# Altium PCB PCB1.PcbDoc
Units mil, origin at the board's own origin, x right, y up, seen from the top; angles counter-clockwise.
Board outline 4505.03 x 3000.03 mil, 4 copper layers (Top Layer, Internal Plane 1, Internal Plane 2, Bottom Layer), stack 25.634 mil thick; 48 components, 53 nets, 188 pads, 9 vias.
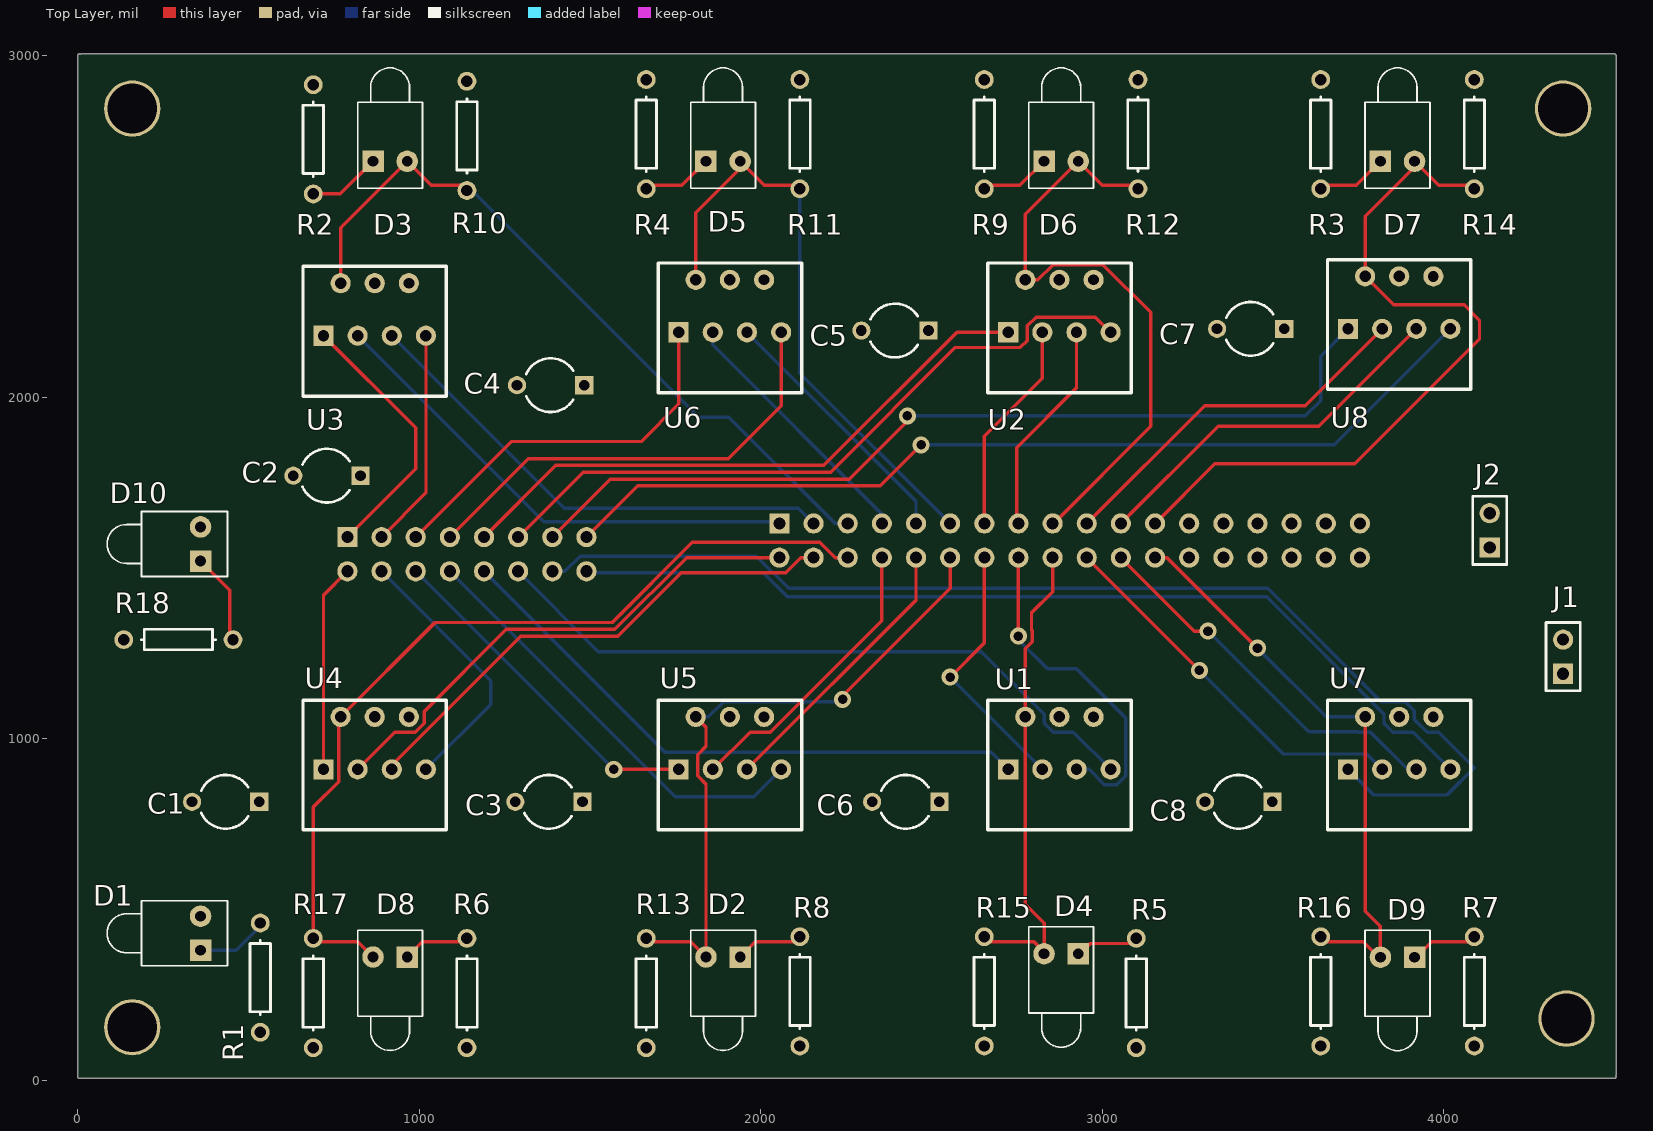
[diagram p0: Top Layer view]
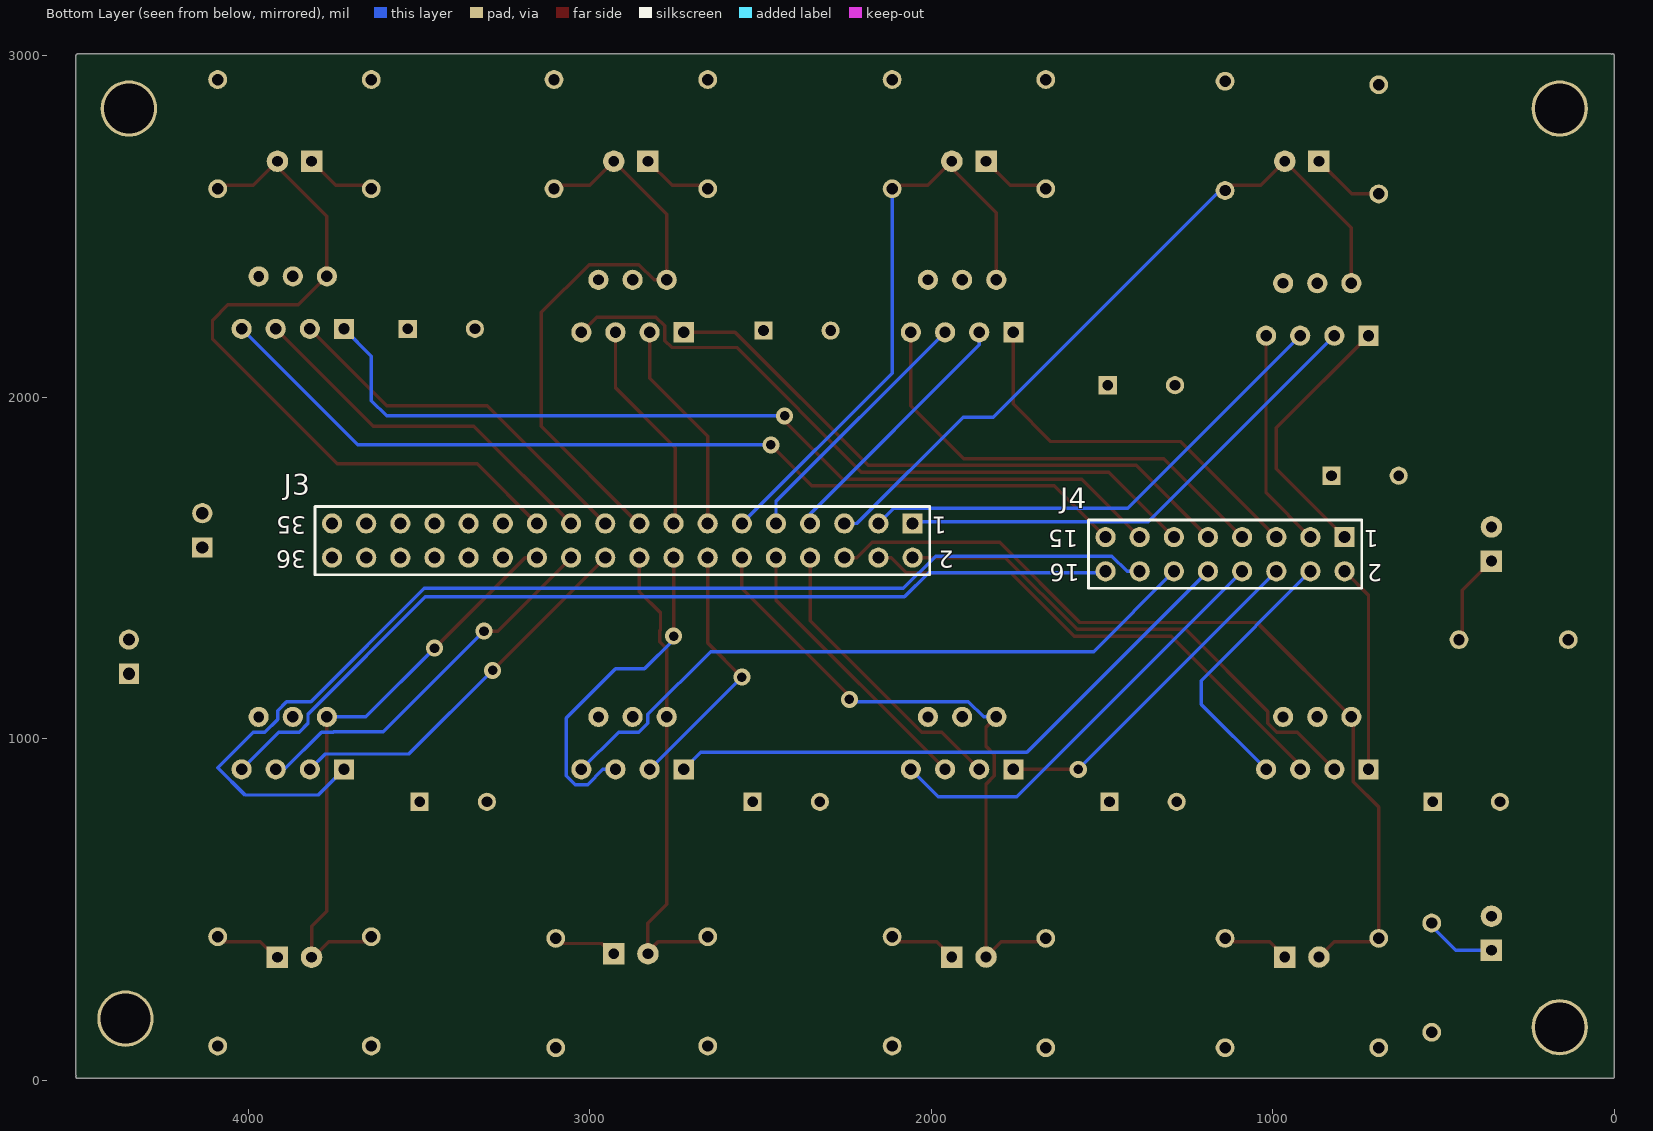
[diagram p1: Bottom Layer view, seen from below]
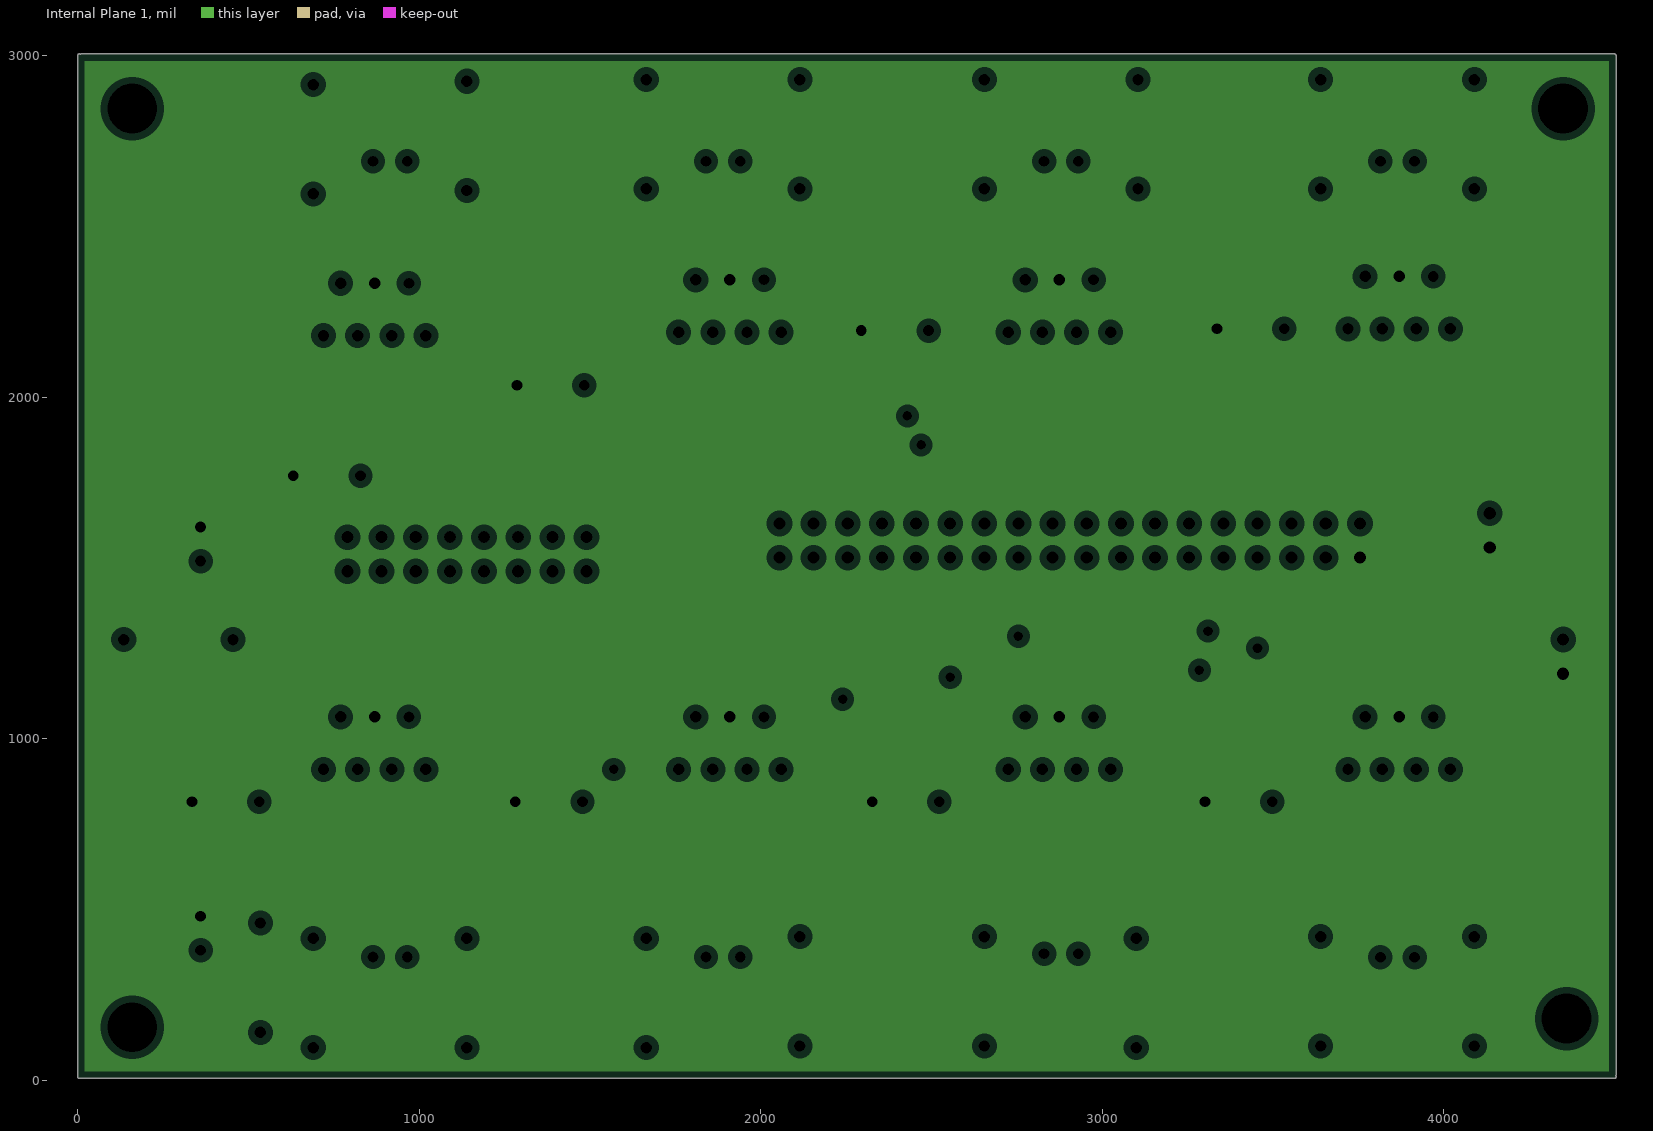
[diagram p2: Internal Plane 1, clearances drawn from the general rule]
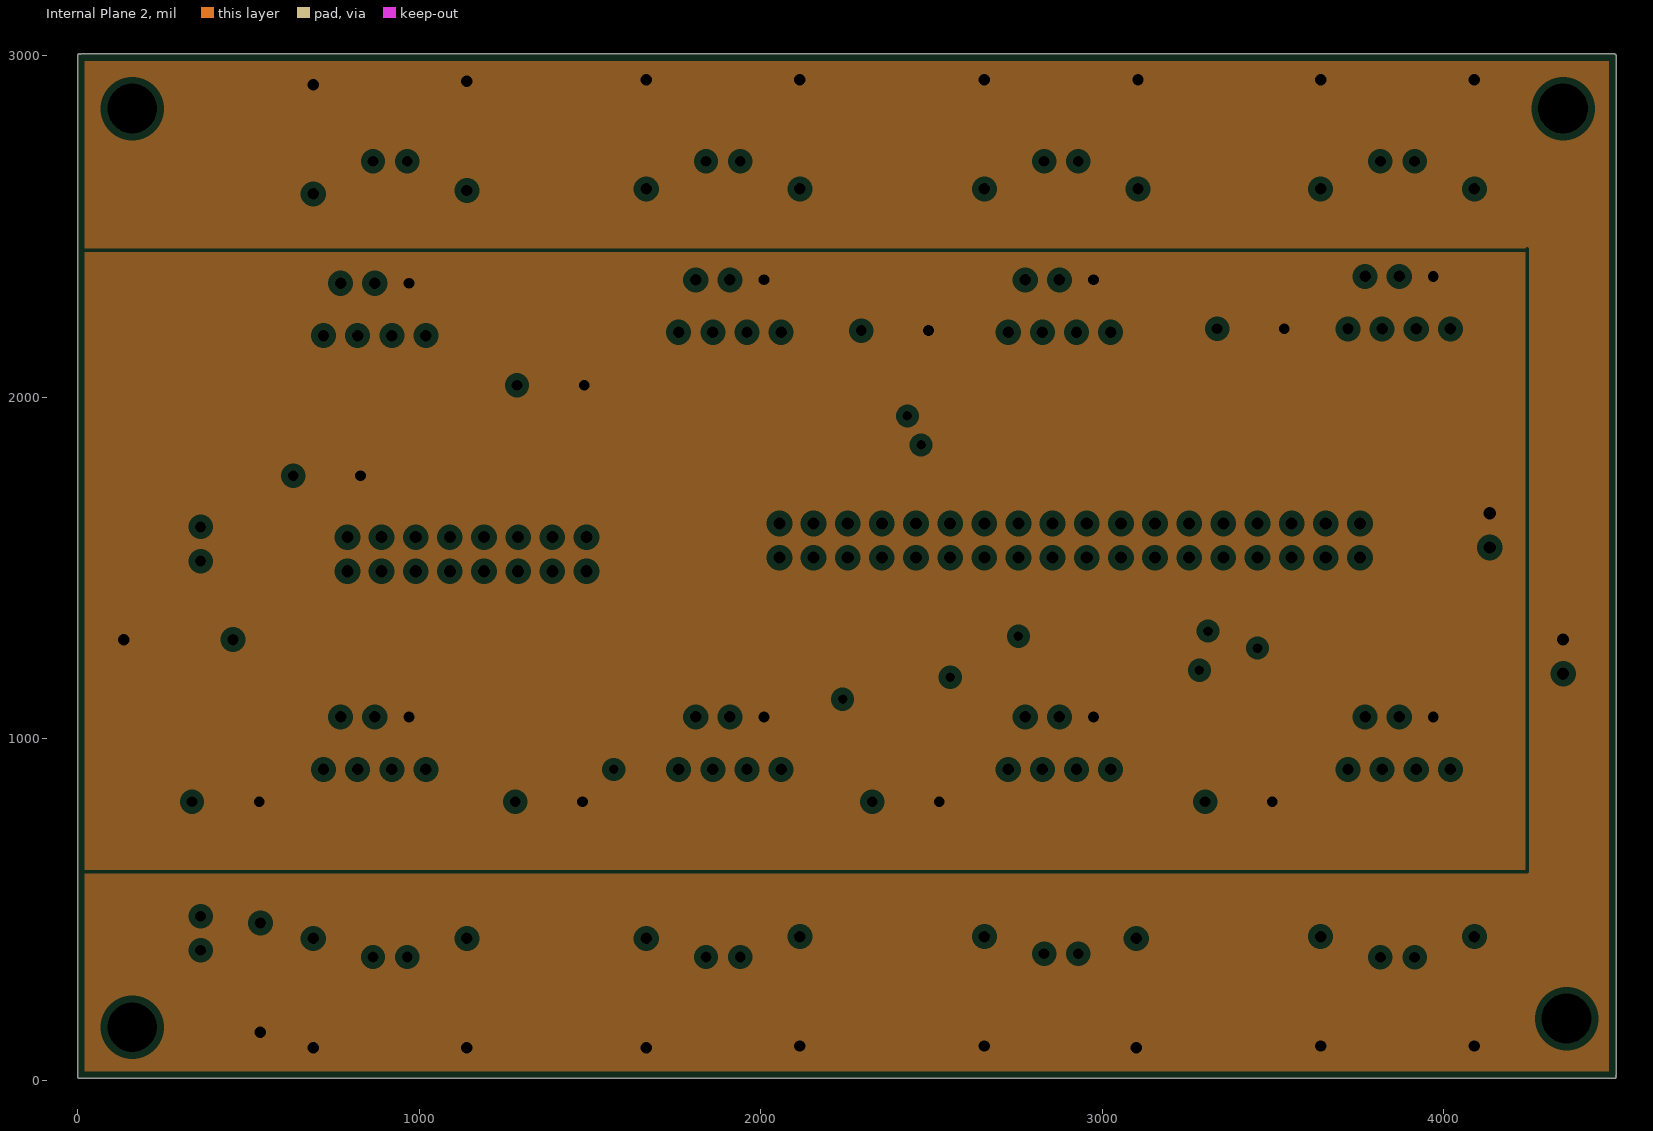
[diagram p3: Internal Plane 2, clearances drawn from the general rule]

## Layer stack, top to bottom
Top Solder: solder mask 0.4, Solder Resist, Dk 3.5
Top Layer: signal copper 1.4
Dielectric 1: prepreg 5, FR-4, Dk 4.2
Internal Plane 1: plane copper 1.417, net GND
Dielectric 3: core 10, Dk 4.2
Internal Plane 2: plane copper 1.417, net (Multiple Nets)
Dielectric 2: prepreg 5, Dk 4.2
Bottom Layer: signal copper 1.4
Bottom Solder: solder mask 0.4, Solder Resist, Dk 3.5

## Board outline
5,4.99 cw(c5,10) -0.01,10 -0.01,3000 cw(c5,3000) 7.5,3004.35 cw(c10,3000) 10,3005.01 4500,3005.01 cw(c4500,3000) 4505.02,3000 4505.02,15 cw(c4500,15) 4504.35,12.5 cw(c4500,10) 4505.02,10 cw(c4500,10) 4500,4.99

## Design rules (kind name [scope] priority, off if disabled: settings)
Clearance [All] p1: gap=10
HoleSize [All] p1: absolutevalues=TRUE maxlimit=200 minlimit=1 maxpercent=80.000 minpercent=20.000
PlaneClearance [All] p1: clearance=20
PlaneConnect [All] p1: planeconnectstyle=Relief reliefexpansion=20 reliefentries=4 reliefconductorwidth=10 reliefairgap=10
PolygonConnect [All] p1: connectstyle=Relief reliefconductorwidth=10 reliefentries=4 polygonreliefangle="90 Angle" airgapwidth=10
RoutingVias [All] p1: holewidth=28 width=50 viastyle="Through Hole" minholewidth=28 minwidth=50 maxholewidth=28 maxwidth=50
SolderMaskExpansion [All] p1: expansion=4
Width [All] p1: maxlimit=10 minlimit=10 preferedwidth=10
27 further rules are at their usual default settings.

## Components (designator, comment, footprint, x,y, rotation, side; value= is the part's Value field where it differs from the comment)
C1 "Cap1" CAPR5-4X5 433.43,815 r180 top
C2 "Cap1" CAPR5-4X5 730,1770 r180 top
C3 "Cap2" CAPR5-4X5 1380,815 r180 top
C4 "Cap2" CAPR5-4X5 1385,2035 r180 top
C5 "Cap2" CAPR5-4X5 2393.43,2195 r180 top
C6 "Cap2" CAPR5-4X5 2425,815 r180 top
C7 "Cap1" CAPR5-4X5 3435,2200 r180 top
C8 "Cap1" CAPR5-4X5 3400,815 r180 top
D1 "GREEN LED" LED-1 360,430 r180 top
D2 "RED LED" LED-1 1890,360.49 r270 top
D3 "RED LED" LED-1 915,2690.61 r90 top
D4 "RED LED" LED-1 2880,370 r270 top
D5 "RED LED" LED-1 1890,2690.61 r90 top
D6 "RED LED" LED-1 2880,2690.61 r90 top
D7 "RED LED" LED-1 3865,2690.61 r90 top
D8 "RED LED" LED-1 915,360.49 r270 top
D9 "RED LED" LED-1 3865,360 r270 top
D10 "GREEN LED" LED-1 360,1570 r180 top
J1 "3.3V PS" HDR1X2 4350,1190 r90 top
J2 "12V PS" HDR1X2 4135,1560 r90 top
J3 "Header 18X2" HDR2X18 2055,1630 r0 bottom
J4 "Header 8X2" HDR2X8 790,1590 r0 bottom
R1 "Res2" AXIAL-0.3 535,300 r270 top
R2 "Res2" AXIAL-0.3 690,2755 r90 top
R3 "Res2" AXIAL-0.3 3640,2770 r90 top
R4 "Res2" AXIAL-0.3 1665,2770 r90 top
R5 "Res2" AXIAL-0.3 3100,255 r270 top
R6 "Res2" AXIAL-0.3 1140,255 r270 top
R7 "Res2" AXIAL-0.3 4090,260 r270 top
R8 "Res2" AXIAL-0.3 2115,260 r270 top
R9 "Res2" AXIAL-0.3 2655,2770 r90 top
R10 "Res1" AXIAL-0.3 1140,2765 r90 top
R11 "Res1" AXIAL-0.3 2115,2770 r90 top
R12 "Res1" AXIAL-0.3 3105,2770 r90 top
R13 "Res1" AXIAL-0.3 1665,255 r270 top
R14 "Res1" AXIAL-0.3 4090,2770 r90 top
R15 "Res1" AXIAL-0.3 2655,260 r270 top
R16 "Res1" AXIAL-0.3 3640,260 r270 top
R17 "Res1" AXIAL-0.3 690,255 r270 top
R18 "Res3" AXIAL-0.3 295,1290 r180 top
U1 "TLE 5206-2S" "TLE 5206-2" 2665,732.83 r0 top
U2 "TLE 5206-2S" "TLE 5206-2" 2665,2012.83 r0 top
U3 "TLE 5206-2S" "TLE 5206-2" 660,2002.83 r0 top
U4 "TLE 5206-2S" "TLE 5206-2" 660,732.83 r0 top
U5 "TLE 5206-2S" "TLE 5206-2" 1700,732.83 r0 top
U6 "TLE 5206-2S" "TLE 5206-2" 1700,2012.83 r0 top
U7 "TLE 5206-2S" "TLE 5206-2" 3660,732.83 r0 top
U8 "TLE 5206-2S" "TLE 5206-2" 3660,2022.83 r0 top

## Footprints (in the part's own frame and the unit in brackets; to place one, negate y for a bottom-side part, rotate by r counter-clockwise, add the part's x,y. Pads: shape width x height; smd on the part's side, far side on the other; paste and mask are expansions set on the pad)
AXIAL-0.3 [mm] "Axial Device, Thru-Hole; 2 Leads; 0.3 in Pin Spacing"
  round 1.4 hole 0.85: 1(-4.064,0) 2(4.064,0)
  silkscreen extent -2.77,-0.76 2.77,0.76
CAPR5-4X5 [mm] "Capacitor; 2 Leads"
  rect 1.35x1.35 hole 0.8: 1(-2.5,0)
  round 1.35 hole 0.8: 2(2.5,0)
  silkscreen extent -1.69,-2 1.82,2
HDR1X2 [mm] "Connector; Header; 2 Position"
  rect 1.5x1.5 hole 0.9: 1(0,0)
  round 1.5 hole 0.9: 2(2.54,0)
  silkscreen extent -1.27,-1.27 3.81,1.27
HDR2X8 [mm] "Connector; Header; 8x2 Position"
  rect 1.5x1.5 hole 0.9: 1(0,0)
  round 1.5 hole 0.9: 2(0,2.54) 3(2.54,0) 4(2.54,2.54) 5(5.08,0) 6(5.08,2.54) 7(7.62,0) 8(7.62,2.54) 9(10.16,0) 10(10.16,2.54) 11(12.7,0) 12(12.7,2.54) 13(15.24,0) 14(15.24,2.54) 15(17.78,0) 16(17.78,2.54)
  silkscreen extent -1.27,-1.27 19.05,3.81
HDR2X18 [mm] "Connector; Header; 18x2 Position"
  rect 1.5x1.5 hole 0.9: 1(0,0)
  round 1.5 hole 0.9: 2(0,2.54) 3(2.54,0) 4(2.54,2.54) 5(5.08,0) 6(5.08,2.54) 7(7.62,0) 8(7.62,2.54) 9(10.16,0) 10(10.16,2.54) 11(12.7,0) 12(12.7,2.54) 13(15.24,0) 14(15.24,2.54) 15(17.78,0) 16(17.78,2.54) 17(20.32,0) 18(20.32,2.54) 19(22.86,0) 20(22.86,2.54) 21(25.4,0) 22(25.4,2.54) 23(27.94,0) 24(27.94,2.54) 25(30.48,0) 26(30.48,2.54) 27(33.02,0) 28(33.02,2.54) 29(35.56,0) 30(35.56,2.54) 31(38.1,0) 32(38.1,2.54) 33(40.64,0) 34(40.64,2.54) 35(43.18,0) 36(43.18,2.54)
  silkscreen extent -1.27,-1.27 44.45,3.81
LED-1 [mm] "LED; 2 Leads"
  rect 1.6x1.6 hole 0.8: 1(0,1.27)
  round 1.6 hole 0.8: 2(0,-1.27)
  silkscreen extent -2,-2.41 6.95,2.41
"TLE 5206-2" [mm] "H-bridge bent legs"
  rect 1.5x1.5 hole 0.85: 1(1.524,4.5)
  round 1.5 hole 0.85: 2(2.794,8.4) 3(4.064,4.5) 4(5.334,8.4) 5(6.604,4.5) 7(9.144,4.5)
  round 1.5 hole 0.8: 6(7.874,8.4)
  silkscreen extent 0,0 10.67,9.65

## Part data
C1 C2 C7 C8: library part Cap2, "Capacitor"
C3 C4 C5 C6: "Capacitor"
D1 D2 D3 D4 D5 D6 D7 D8 D9 D10: library part LED1, "Typical RED GaAs LED"
J1 J2: library part "Header 2", "Header, 2-Pin"
J3: "Header, 18-Pin, Dual row"
J4: "Header, 8-Pin, Dual row"
R1 R2 R3 R4 R5 R6 R7 R8 R9 R18: library part Res1, "Resistor"
R10 R11 R12 R13 R14 R15 R16 R17: "Resistor"
U1 U2 U3 U4 U5 U6 U7 U8: "Infineon TLE 5206-2S Hbridge"

## Free pads (board coordinates)
  round 165 hole 146: 2(160,2845) 5(160,155) 5(4350,2845) 5(4360,180)

## Via types
v1: diameter 50, hole 28, Top Layer to Bottom Layer, 9 vias

## Nets (pads, with @x,y where several pads share a name; then routed paths per layer and width w, separated by ;. In a path a pad name is that pad's centre, name@x,y a point inside that pad or via, vN(x,y) a via of type N, cw(c..) or ccw(c..) an arc to the next point about the centre after c; other vN are vias at no path point)
GND: C1.2 C2.2 C3.2 C4.2 C5.2 C6.2 C7.2 C8.2 D1.2 D10.2 J1.1 J2.1 J3.36 U1.4 U2.4 U3.4 U4.4 U5.4 U6.4 U7.4 U8.4
H1_EF: D3.2 J3.5 R10.1 U3.2 | length 2167.2
  Top Layer w10: U3.2 770,2495.61 D3.2 1035.61,2620 R10.1@1140,2620
  Bottom Layer w10: R10.1@1140,2620 1818.43,1941.57 1906.4,1941.57 2217.97,1630 J3.5
H1_IN1: J3.1 U3.3 | length 1465.5
  Bottom Layer w10: U3.3 1365.47,1634.53 2055,1634.53 J3.1
H1_IN2: J3.3 U3.5 | length 1462.8
  Bottom Layer w10: U3.5 1425.47,1674.53 2110.47,1674.53 J3.3
H1_OUT1: J4.1 U3.1 | length 784.7
  Top Layer w10: U3.1 990,1910 990,1790 J4.1
H1_OUT2: J4.3 U3.7 | length 643.8
  Top Layer w10: J4.3 1020,1720 U3.7
H2_EF: D5.2 J3.11 R11.1 U6.2 | length 1777.4
  Top Layer w10: U6.2 1810,2540 1940,2670 D5.2 2010.61,2620 R11.1@2115,2620
  Bottom Layer w10: R11.1@2115,2620 R11.1 2115,2070 J3.11
H2_IN1: J3.7 U6.3 | length 765
  Bottom Layer w10: U6.3 1860,2152.79 2355,1657.79 J3.7
H2_IN2: J3.9 U6.5 | length 765
  Bottom Layer w10: U6.5 2455,1695 J3.9
H2_OUT1: J4.5 U6.1 | length 1141.5
  Top Layer w10: J4.5 1270,1870 1650,1870 1760,1980 U6.1
H2_OUT2: J4.7 U6.7 | length 1344.5
  Top Layer w10: J4.7 1320,1820 1905,1820 2060,1975 U6.7
H3_EF: D6.2 J3.17 R12.1 U2.2 | length 1797.4
  Top Layer w10: J3.17 2857.79,1630 3141.93,1914.14 3141.93,2248.07 3001.93,2388.07 2856.56,2388.07 2812.03,2343.54 U2.2 2775,2535.61 D6.2 3000.61,2620 R12.1@3105,2620
H3_IN1: J3.13 U2.3 | length 630.4
  Top Layer w10: J3.13 2655,1885 2825,2055 U2.3
H3_IN2: J3.15 U2.5 | length 637.5
  Top Layer w10: J3.15 2750,1630 2750,1852.22 2925,2027.22 U2.5
H3_OUT1: J4.9 U2.1 | length 1783.5
  Top Layer w10: J4.9 1400,1800 2185,1800 2575,2190 U2.1
H3_OUT2: J4.11 U2.7 | length 2045.7
  Top Layer w10: J4.11 1480,1780 2205,1780 2570.47,2145.47 2760.74,2145.47 2780.47,2165.2 2780.47,2208.44 2806.56,2234.53 2980.47,2234.53 U2.7
H4_EF: D7.2 J3.23 R14.1 U8.2 | length 2226
  Top Layer w10: J3.23 3330,1805 3740,1805 4105,2170 4105,2225 4060,2270 3853.54,2270 U8.2 3770,2530 3915,2675 D7.2 3985.61,2620 R14.1@4090,2620
  Bottom Layer w10: U8.2@3764.53,2348.07 U8.2
H4_IN1: J3.19 U8.3 | length 1101.1
  Top Layer w10: J3.19 3300,1975 3595,1975 U8.3
H4_IN2: J3.21 U8.5 | length 1101.1
  Top Layer w10: J3.21 3340,1915 3635,1915 U8.5
H4_OUT1: J4.13 U8.1 | length 2667.6
  Top Layer w10: J4.13 1560,1760 2260,1760 2430,1930 v1(2430,1945)
  Bottom Layer w10: v1(2430,1945) 3595,1945 3640,1990 3640,2120 U8.1
H4_OUT2: J4.15 U8.7 | length 2793.3
  Top Layer w10: J4.15 1640,1740 2350,1740 v1(2470,1860) v1@2477.5,1867.5
  Bottom Layer w10: v1(2470,1860) 3680,1860 U8.7
H5_EF: D8.2 J3.6 R17.1 U4.2 | length 2600.2
  Top Layer w10: D8.2 820.49,405 690,405 R17.1 690,799.73 764.53,874.26 764.53,1058.07 1046.46,1340 1565,1340 1799.53,1574.53 2173.44,1574.53 2217.97,1530 J3.6
H5_IN1: J3.2 U4.3 | length 1512
  Top Layer w10: U4.3 929.02,1019.02 988.44,1019.02 1014.53,1045.1 1014.53,1079.53 1255,1320 1573.28,1320 1783.28,1530 J3.2
H5_IN2: J3.4 U4.5 | length 1499
  Top Layer w10: U4.5 920,922.29 1297.71,1300 1581.57,1300 1767.04,1485.47 2073.44,1485.47 2117.97,1530 J3.4
H5_OUT1: J4.2 U4.1 | length 609
  Top Layer w10: U4.1 720,1420 J4.2
H5_OUT2: J4.4 U4.7 | length 791.2
  Bottom Layer w10: J4.4 1210,1170 1210,1100 U4.7
H6_EF: D2.2 J3.12 R13.1 U5.2 | length 1916
  Top Layer w10: R13.1@1665,405 1795.49,405 D2.2 1840,867.03 1815.47,891.56 1815.47,952.97 1840,977.5 1840,1033.54 U5.2 ; v1@2240,1125 2555,1440 J3.12
  Bottom Layer w10: U5.2 1847.03,1063.54 1891.56,1108.07 2233.07,1108.07 v1(2240,1115)
H6_IN1: J3.8 U5.3 | length 859.8
  Top Layer w10: U5.3 1969.02,1019.02 2028.44,1019.02 2355,1345.57 J3.8
H6_IN2: J3.10 U5.5 | length 825
  Top Layer w10: U5.5 2455,1405 J3.10
H6_OUT1: J4.6 U5.1 | length 1010.2
  Top Layer w10: v1(1570,910) U5.1
  Bottom Layer w10: J4.6 v1(1570,910)
H6_OUT2: J4.8 U5.7 | length 1276.5
  Bottom Layer w10: J4.8 1750,830 1980,830 U5.7
H7_EF: D4.2 J3.18 R15.1 U1.2 | length 1427.4
  Top Layer w10: R15.1@2655,405 2800.49,405 D4.2@2825.25,380.25 ; D4.2@2830,365 D4.2 2830,460 2775,515 U1.2 2775,1263.43 2795,1283.43 2795,1316.57 2793.28,1318.28 2793.28,1368.28 2855,1430 J3.18
  Bottom Layer w10: J3.18@2855,1505.47 J3.18
H7_IN1: J3.14 U1.3 | length 780.3
  Top Layer w10: v1(2555,1180) 2655,1280 J3.14
  Bottom Layer w10: v1@2550,1185 v1(2555,1180) U1.3
H7_IN2: J3.16 U1.5 | length 1006.8
  Top Layer w10: v1(2755,1300) J3.16
  Bottom Layer w10: v1@2755,1290 2840,1205 2925,1205 3069.53,1060.47 3069.53,891.56 3043.44,865.47 3006.56,865.47 2962.03,910 U1.5 ; J3.16@2755,1505.47 J3.16
H7_OUT1: J4.10 U1.1 | length 1775.2
  Bottom Layer w10: J4.10 1720,960 2675,960 U1.1
H7_OUT2: J4.12 U1.7 | length 1990.4
  Bottom Layer w10: J4.12 1525,1255 2646.52,1255 2830.47,1071.04 2830.47,1045.1 2856.56,1019.02 2915.98,1019.02 U1.7
H8_EF: D9.2 J3.24 R16.1 U7.2 | length 1731.1
  Top Layer w10: J3.24 3190,1530 v1(3455,1265) ; R16.1@3640,405 3765,405 3815,355 D9.2 3815,450 3770,495 U7.2
  Bottom Layer w10: v1(3455,1265) 3656.46,1063.54 U7.2
H8_IN1: J3.20 U7.3 | length 1126.8
  Top Layer w10: J3.20 v1(3285,1200) v1@3290,1200
  Bottom Layer w10: v1(3285,1200) 3530,955 3775,955 U7.3
H8_IN2: J3.22 U7.5 | length 1114.7
  Top Layer w10: J3.22 3270,1315 v1(3310,1315)
  Bottom Layer w10: v1@3315,1310 3605,1020 3750.57,1020 3751.56,1019.02 3785.98,1019.02 3895,910 U7.5
H8_OUT1: J4.14 U7.1 | length 3424.5
  Bottom Layer w10: J4.14 1427.03,1490 1471.56,1534.53 1987.5,1534.53 2082.03,1440 3484.8,1440 3816.73,1108.07 3888.44,1108.07 3914.53,1081.99 3914.53,1056.04 3951.56,1019.02 3985.98,1019.02 4090,915 4010,835 3795,835 U7.1
H8_OUT2: J4.16 U7.7 | length 2788.1
  Bottom Layer w10: J4.16 1490,1485.47 2008.27,1485.47 2078.74,1415 3481.52,1415 3825.47,1071.04 3825.47,1045.1 3851.56,1019.02 3910.98,1019.02 U7.7
NetD1_1: D1.1 R1.1 | length 204
  Bottom Layer w10: D1.1 465,380 R1.1@535,450
NetD2_1: D2.1 R8.1 | length 193.4
  Top Layer w10: D2.1 1984.51,405 R8.1@2115,405
NetD3_1: D3.1 R2.1 | length 214.6
  Top Layer w10: R2.1 769.39,2595 D3.1
NetD4_1: D4.1 R5.1 | length 184.5
  Top Layer w10: D4.1@2930,365 2965,400 R5.1@3100,400
NetD5_1: D5.1 R4.1 | length 204.2
  Top Layer w10: R4.1@1665,2620 1769.39,2620 D5.1
NetD6_1: D6.1 R9.1 | length 204.2
  Top Layer w10: R9.1@2655,2620 2759.39,2620 D6.1
NetD7_1: D7.1 R3.1 | length 204.2
  Top Layer w10: R3.1@3640,2620 3744.39,2620 D7.1
NetD8_1: D8.1 R6.1 | length 193.4
  Top Layer w10: D8.1 1009.51,405 R6.1@1140,405
NetD9_1: D9.1 R7.1 | length 195.7
  Top Layer w10: D9.1@3915,355 3965,405 R7.1@4090,405
NetD10_1: D10.1 R18.1 | length 265.2
  Top Layer w10: D10.1 445,1435 R18.1@445,1290
"VCC 3.3V": J1.2 R1.2 R2.2 R3.2 R4.2 R5.2 R6.2 R7.2 R8.2 R9.2 R10.2 R11.2 R12.2 R13.2 R14.2 R15.2 R16.2 R17.2
"VCC 12V": C1.1 C2.1 C3.1 C4.1 C5.1 C6.1 C7.1 C8.1 J2.2 R18.2 U1.6 U2.6 U3.6 U4.6 U5.6 U6.6 U7.6 U8.6
pads on no net: J3.25 J3.26 J3.27 J3.28 J3.29 J3.30 J3.31 J3.32 J3.33 J3.34 J3.35

## Polygon pours and split planes (outlines as drawn)
GND on Internal Plane 1 (split plane): 4484.92,25.08 20.08,25.08 20.08,2984.92 4484.92,2984.92
"VCC 3.3V" on Internal Plane 2 (split plane): 4484.92,25.08 20.08,25.08 20.08,604.9 4245,604.9 4246.95,605.29 4248.6,606.4 4249.71,608.05 4250.1,610 4250.1,2435.1 4249.71,2437.05 4248.6,2438.7 4246.95,2439.81 4245,2440.2 4243.05,2439.81 4241.4,2438.7 4240.29,2437.05 4239.9,2435.1 20.08,2435.1 20.08,2984.92 4484.92,2984.92
"VCC 12V" on Internal Plane 2 (split plane): 4239.9,615.1 20.08,615.1 20.08,2424.9 4239.9,2424.9

## Other copper
Internal Plane 2 (plane layer: these items are gaps in the copper):
  lines w10: -5,610 4245,610 4245,2435.1 ; 20,2430 4245,2430

## Silkscreen, mask and mechanical layers (free items; w line width, h text height)
Mechanical 1:
  lines w10: 5,2900 10,2905 ; 5,3000 5,10 4500,10 ; 10,3000 4500,3000 4500,15 ; 3975,10 3980,15

## Text inside footprints (layer, text, board x,y; h text height)
J3: Bottom Overlay "36" at 3830,1550 h50 r180; Bottom Overlay "35" at 3830,1650 h50 r180; Bottom Overlay "1" at 1955,1650 h50 r180; Bottom Overlay "2" at 1935,1550 h50 r180
J4: Bottom Overlay "2" at 680,1510 h50 r180; Bottom Overlay "1" at 690,1610 h50 r180; Bottom Overlay "15" at 1570,1610 h50 r180; Bottom Overlay "16" at 1565,1510 h50 r180